# Altium PCB PCB1.PcbDoc
Units mm, origin at the board's own origin, x right, y up, seen from the top; angles counter-clockwise.
Board outline 30.86 x 30.86 mm, 2 copper layers (Top Layer, Bottom Layer); 10 components, 6 nets, 22 pads, 0 vias.
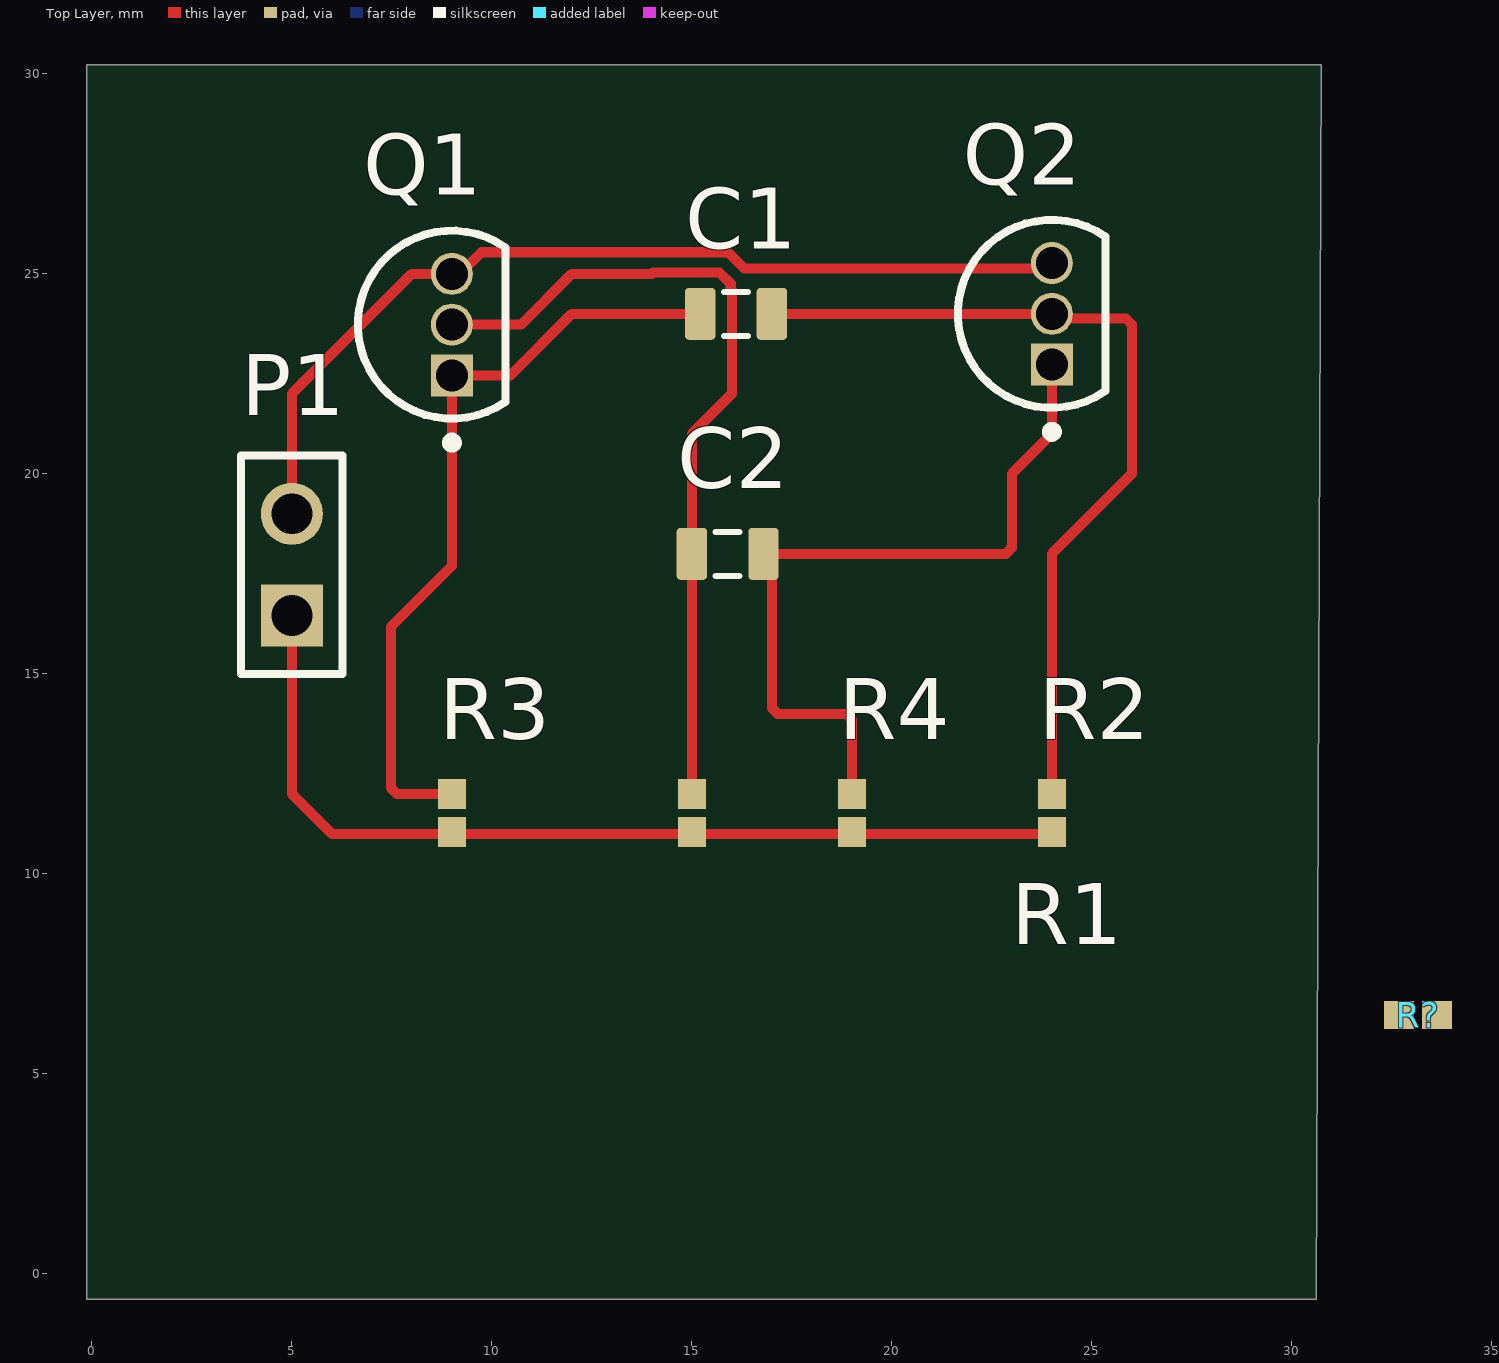
[diagram p0: Top Layer view]
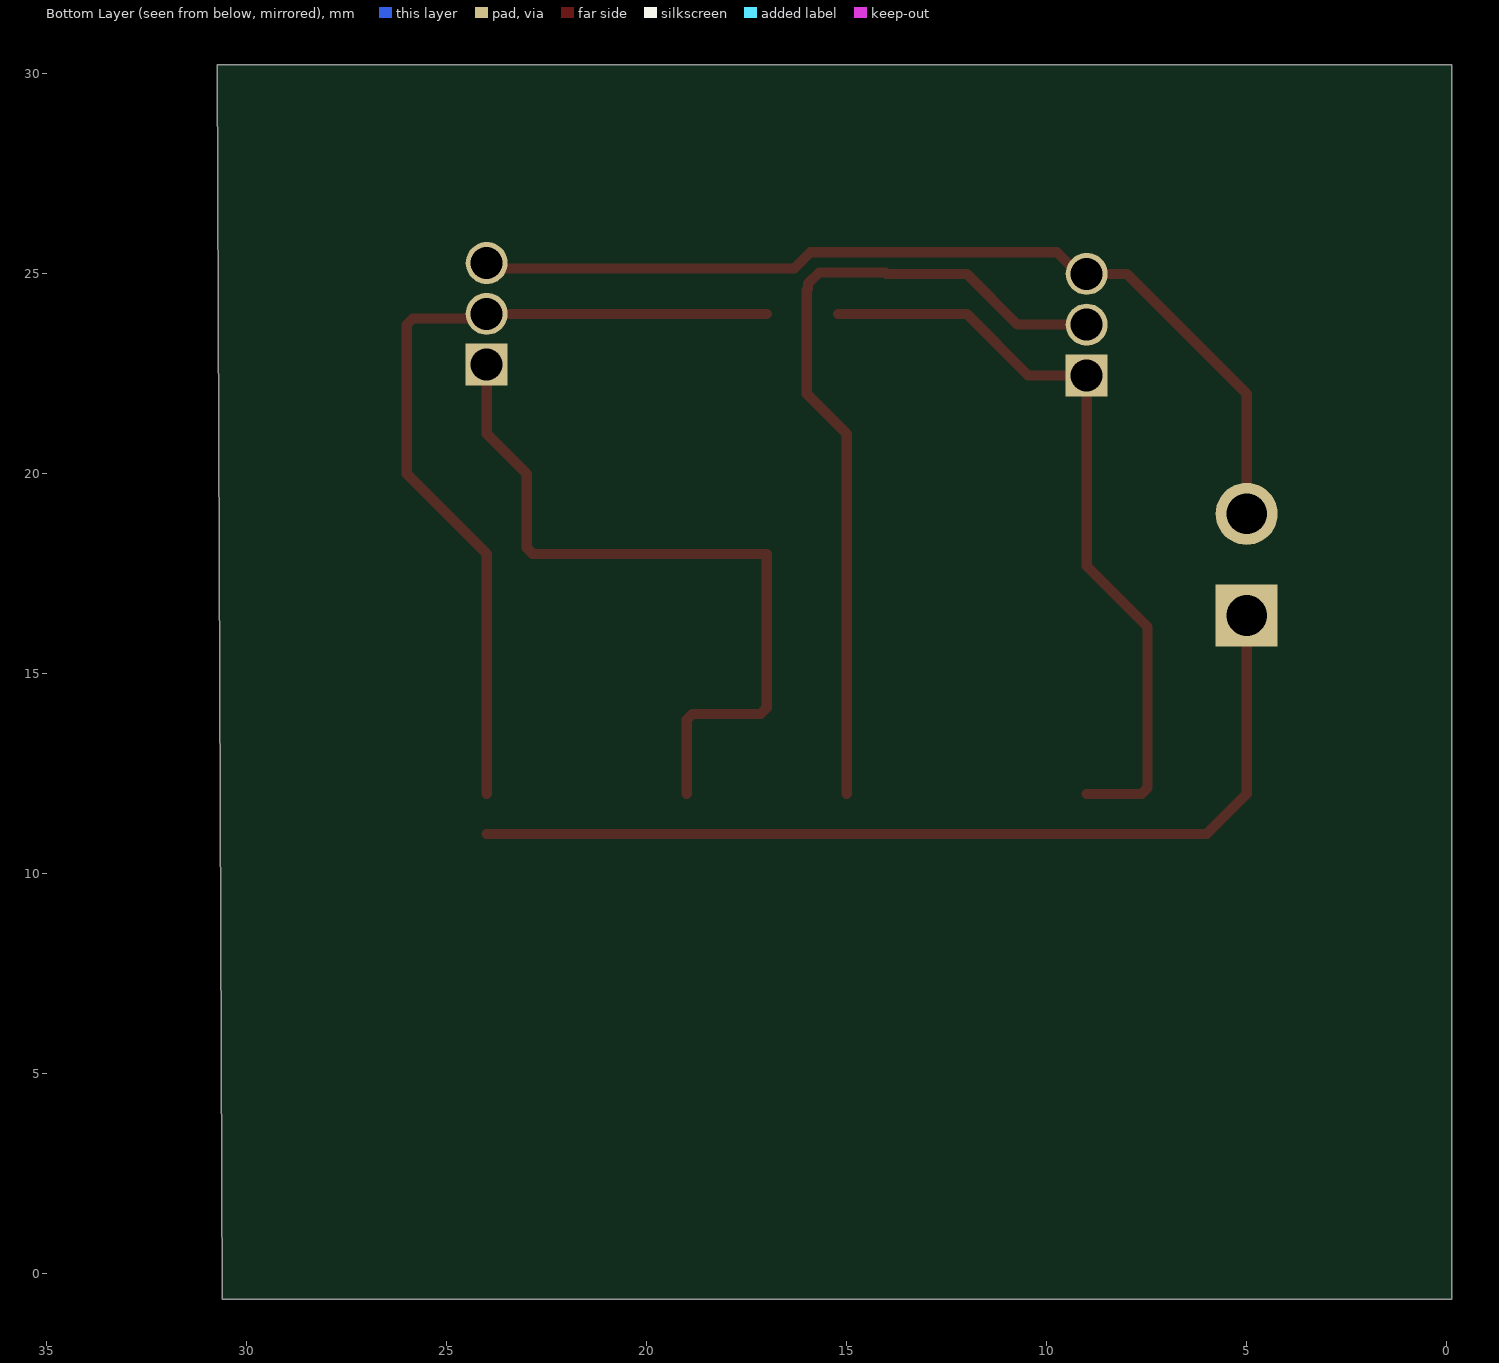
[diagram p1: Bottom Layer view, seen from below]
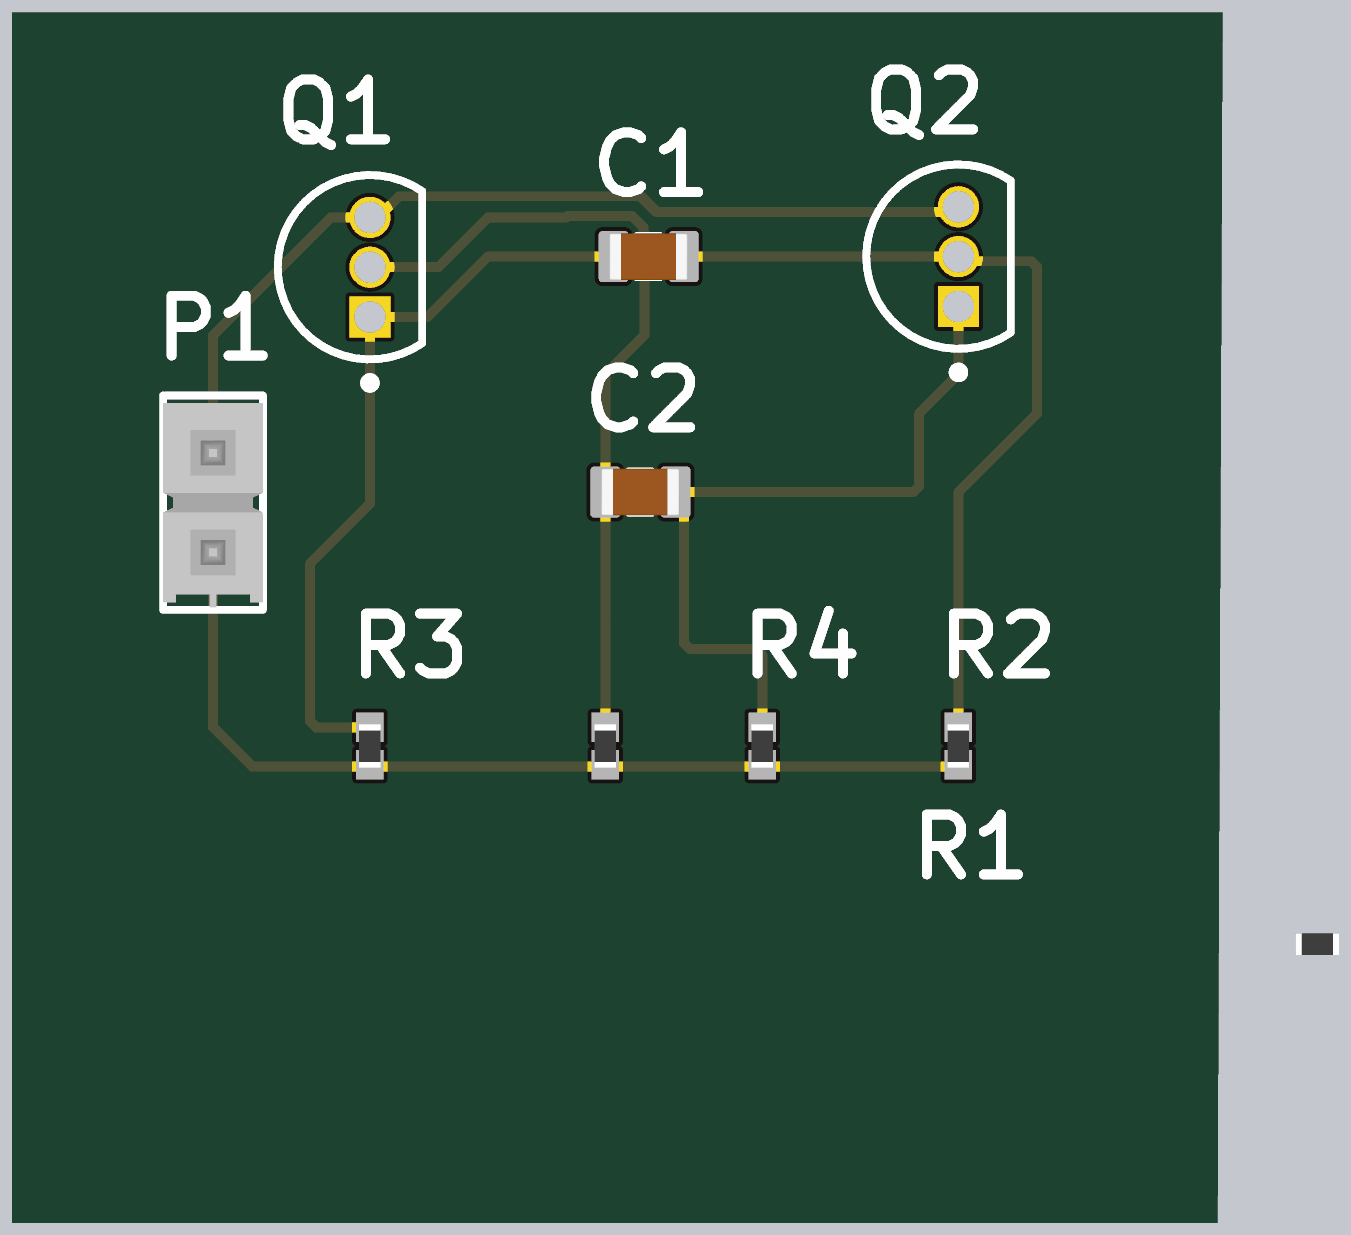
[diagram p2: 3D render of the assembled board from above, using the file's embedded part models]

## Layer stack, top to bottom
Top Solder: solder mask 0.0102, Solder Resist, Dk 3.5
Top Layer: signal copper 0.035
Dielectric 1: dielectric 0.32, FR-4, Dk 4.8
Bottom Layer: signal copper 0.035
Bottom Solder: solder mask 0.0102, Solder Resist, Dk 3.5

## Board outline
-0.127,-0.635 30.607,-0.635 30.734,30.226 -0.127,30.226

## Design rules (kind name [scope] priority, off if disabled: settings)
Clearance [All] p1: gap=0.25 ignorepadtopadclearanceinfootprint=FALSE except(0.22: THPad-THPad)
MinimumSolderMaskSliver [All] p1: minsoldermaskwidth=0.22
PolygonConnect [All] p1: connectstyle=Relief reliefconductorwidth=0.254 reliefentries=4 polygonreliefangle="90 Angle" airgapwidth=0.254
RoutingVias [All] p1: holewidth=0.711 width=1.27 viastyle="Through Hole" minholewidth=0.711 minwidth=1.27 maxholewidth=0.711 maxwidth=1.27
SilkToSolderMaskClearance [IsPad] p1: minsilkscreentomaskgap=0.175 clearancetoexposedcopper=TRUE
SolderMaskExpansion SolderMaskExpansion_Transistor [HasFootprint('ONSC-TO-92-3-29-11')] p1: expansion=0 istentingtop=FALSE
SolderMaskExpansion [All] p2: expansion=0.102 istentingtop=FALSE
Width [All] p1: maxlimit=0.254 minlimit=0.254 preferedwidth=0.254
28 further rules are at their usual default settings.

## Components (designator, comment, footprint, x,y, rotation, side; value= is the part's Value field where it differs from the comment)
C1 "Capacitor 22µF +/-40% 16V 0805" CAPC0805(2012)145_L 16.1,24 r180 top value=22µF
C2 "Capacitor 22µF +/-40% 16V 0805" CAPC0805(2012)145_L 15.89,18 r180 top value=22µF
P1 "TSW-102-26-F-S" SMTC-TSW-102-26-XX-S 5,16.46 r90 top
Q1 "BC547CG" ONSC-TO-92-3-29-11 9,23.73 r90 top
Q2 "BC547CG" ONSC-TO-92-3-29-11 24,24 r90 top
R1 "Resistor 1k +/-5% 0402 63 mW" RESC1005X40X25ML10T10 15,11.525 r270 top
R2 "Resistor 1k +/-5% 0402 63 mW" RESC1005X40X25ML10T10 24,11.525 r270 top value=100k
R3 "Resistor 1k +/-5% 0402 63 mW" RESC1005X40X25ML10T10 9,11.525 r270 top value=1k
R4 "Resistor 1k +/-5% 0402 63 mW" RESC1005X40X25ML10T10 19,11.525 r270 top value=1k
R? "Resistor 1k +/-5% 0402 63 mW" RESC1005X40X25ML10T10 33.147,6.477 r0 top value=1k

## Footprints (in the part's own frame and the unit in brackets; to place one, negate y for a bottom-side part, rotate by r counter-clockwise, add the part's x,y. Pads: shape width x height; smd on the part's side, far side on the other; paste and mask are expansions set on the pad)
CAPC0805(2012)145_L [mm] "Chip Capacitor, Body 2.0x1.2mm, Height 1.45mm, IPC High Density"
  rrect25% 0.76x1.3 smd: 1(-0.9,0) 2(0.89,0)
  silkscreen extent -0.3,-0.55 0.3,0.55, body extent -1,-0.6 1,0.6, height 1.45
ONSC-TO-92-3-29-11 [mm] "TO, 3-Leads, Body Dia 4.7mm, Pitch 1.27mm"
  rect 1.05x1.05 hole 0.8: 1(-1.27,0)
  round 1.05 hole 0.8: 2(0,0) 3(1.27,0)
  silkscreen extent -3.07,-1.34 2.35,2.35, body extent -2.35,-1.33 2.36,2.36, height 7.87
RESC1005X40X25ML10T10 [mm] "Chip Resistor, 2-Leads, Body 1.1x0.6mm, IPC Low Density"
  rect 0.75x0.7 smd: 1(-0.475,0) 2(0.475,0)
  body extent -0.55,-0.27 0.55,0.28, height 0.4
SMTC-TSW-102-26-XX-S [mm] ".025 SQ Post Terminal Strip Assembly, 1x2 Pins, Vertical, 2.54mm Pitch, Male"
  rect 1.55x1.55 hole 1.02: 1(0,0)
  round 1.55 hole 1.02: 2(2.54,0)
  silkscreen extent -1.46,-1.27 4,1.27, body extent -1.4,-1.27 3.81,1.27, height 8.38

## Part data
C1 C2: library part CMP-001-00081-4, "Chip Capacitor, 22µF +/-5%, 16V, 0603, Thickness 1.45 mm", Case/Package=0805, Max Operating Temperature=85°C, Min Operating Temperature=-55°C, Tolerance=5%, Voltage Rating=16V, Mounting Technology=SMT, Pins=2
P1: library part CMP-1024-00329-1, "0.025\" SQ Post Header, Through-hole, Vertical, -55 to 125 degC, 2.54 mm Pitch, 2-Pin, Male, RoHS", Manufacturer=Samtec, Temperature Range="-55 to 125 degC", ComponentLink1Description="Manufacturer URL", ComponentLink1URL=http://www.samtec.com, ComponentLink2Description=Datasheet, ComponentLink2URL=http://www.samtec.com/documents/webfiles/pdf/TSW_TH.PDF, ComponentLink3Description="Package Specification", ComponentLink3URL=http://www.samtec.com/documents/webfiles/cpdf/TSW-XXX-XX-XXX-X-XX-XXX-MKT.pdf, DatasheetVersion=F-214, Mounting Technology=Through-hole, Orientation=Vertical, PackageDescription=".025[0.64] SQ. Post Terminal Strip Assembly", PackageReference=TSW-102-26-XX-S, PackageVersion="DM, 8/1988", PartNumber=TSW-102-26-F-S, Pitch="2.54 mm", RoHS=True
Q1 Q2: library part CMP-1048-01464-1, "Amplifier Transistor, NPN Silicon, 3-Pin TO-92, Pb-Free, Bulk Box", Manufacturer="On Semiconductor", ComponentLink1Description="Manufacturer URL", ComponentLink1URL=http://www.onsemi.com/, ComponentLink2Description=Datasheet, ComponentLink2URL=http://www.onsemi.com/pub_link/Collateral/BC546-D.PDF, ComponentLink3Description="Package Specification", ComponentLink3URL=http://www.onsemi.cn/pub_link/Collateral/2N6426-D.PDF, DatasheetVersion="Rev. 7", fT Min (MHz)=150, IC Continuous (A)=0.1, Mounting Technology="Through Hole", PackageDescription="3-Pin Transistor Outline, Body 4.825 x 3.685 mm, Pitch 1.27 mm", PackageReference=TO-92-3-29-11_AM_SL, PackageVersion="Rev. AM", Packing="Bulk Box", PartNumber=BC547CG, Polarity=NPN, RoHS=TRUE
R1 R2 R3 R4 R?: library part CMP-009-00013-5, "Chip Resistor, 1 KOhm, +/- 5%, 0.063 W, -55 to 155 degC, 0402 (1005 Metric)", Case/Package=0402, Max Operating Temperature=155°C, Min Operating Temperature=-55°C, Power=63mW, Tolerance=5%, Mounting Technology=SM, Pins=2, RoHS Compliant=True
  R1: R1=100k

## Nets (pads, with @x,y where several pads share a name; then routed paths per layer and width w, separated by ;. In a path a pad name is that pad's centre, name@x,y a point inside that pad or via, vN(x,y) a via of type N, cw(c..) or ccw(c..) an arc to the next point about the centre after c; other vN are vias at no path point)
NetC1_1: C1.1 Q2.2 R2.1 | length 21.5
  Top Layer w0.254: C1.1 Q2.2 ; R2.1 24,18 26,20 26,23.734 25.851,23.882 Q2.2@24.152,23.882
NetC1_2: C1.2 Q1.1 R3.1 | length 19.4
  Top Layer w0.254: R3.1 7.625,12 7.476,12.149 7.476,16.172 9,17.696 Q1.1 10.46,22.46 12,24 C1.2
NetC2_1: C2.1 Q2.1 R4.1 | length 18.9
  Top Layer w0.254: R4.1 19,13.851 18.851,14 17.149,14 17,14.149 17,18 22.851,18 23,18.149 23,20 24,21 Q2.1
NetC2_2: C2.2 Q1.2 R1.1 | length 20.8
  Top Layer w0.254: Q1.2 10.73,23.73 12,25 14,25 14.031,25.031 15.692,25.031 15.971,24.752 15.971,24.627 16,24.598 16,22 15,21 C2.2 R1.1
NetP1_1: P1.1 R1.2 R2.2 R3.2 R4.2 | length 23.9
  Top Layer w0.254: P1.1 5,12 6,11 13,11 18,11 R2.2@24,11
NetP1_2: P1.2 Q1.3 Q2.3 | length 23.7
  Top Layer w0.254: P1.2 5,22 8,25 9.203,25 9.742,25.539 15.903,25.539 16.307,25.135 23.865,25.135 Q2.3
pads on no net: R?.1 R?.2